# Altium PCB Lakota_PCB.PcbDoc
Units mm, origin at the board's own origin, x right, y up, seen from the top; angles counter-clockwise.
Board outline 26.64 x 15.01 mm, 4 copper layers (TOP, LAYER2, LAYER3, BOTTOM), stack 1 mm thick; 32 components, 43 nets, 131 pads, 189 vias.
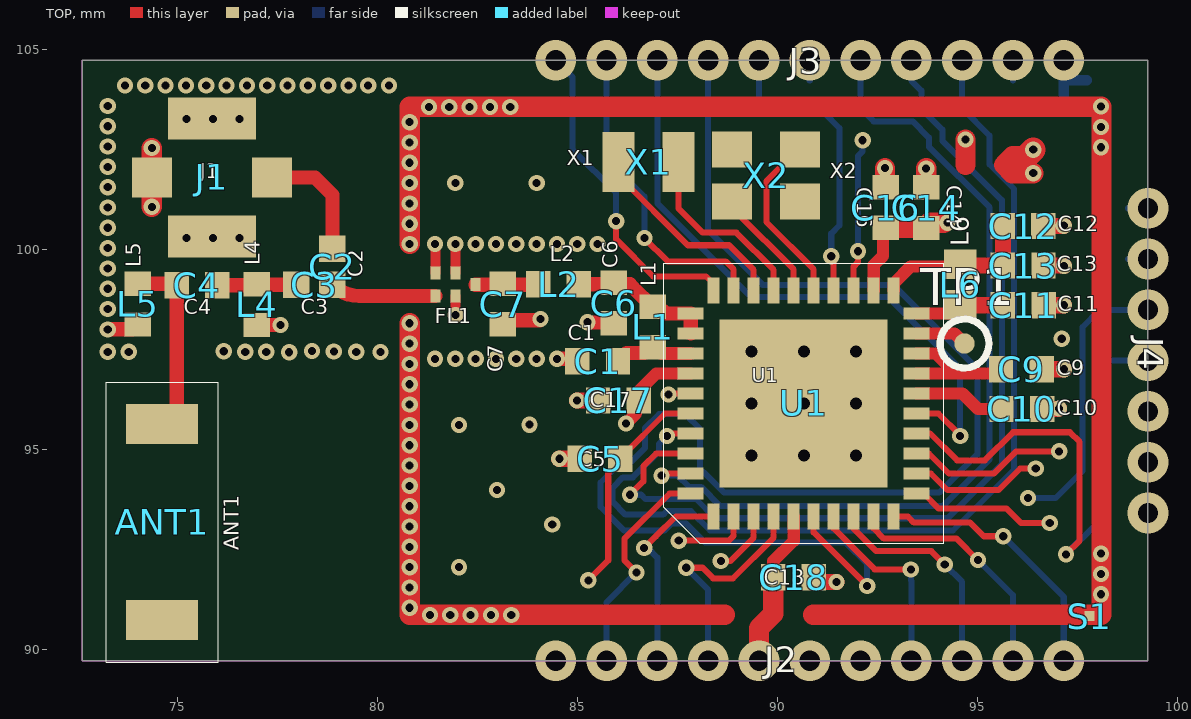
[diagram p0: TOP view]
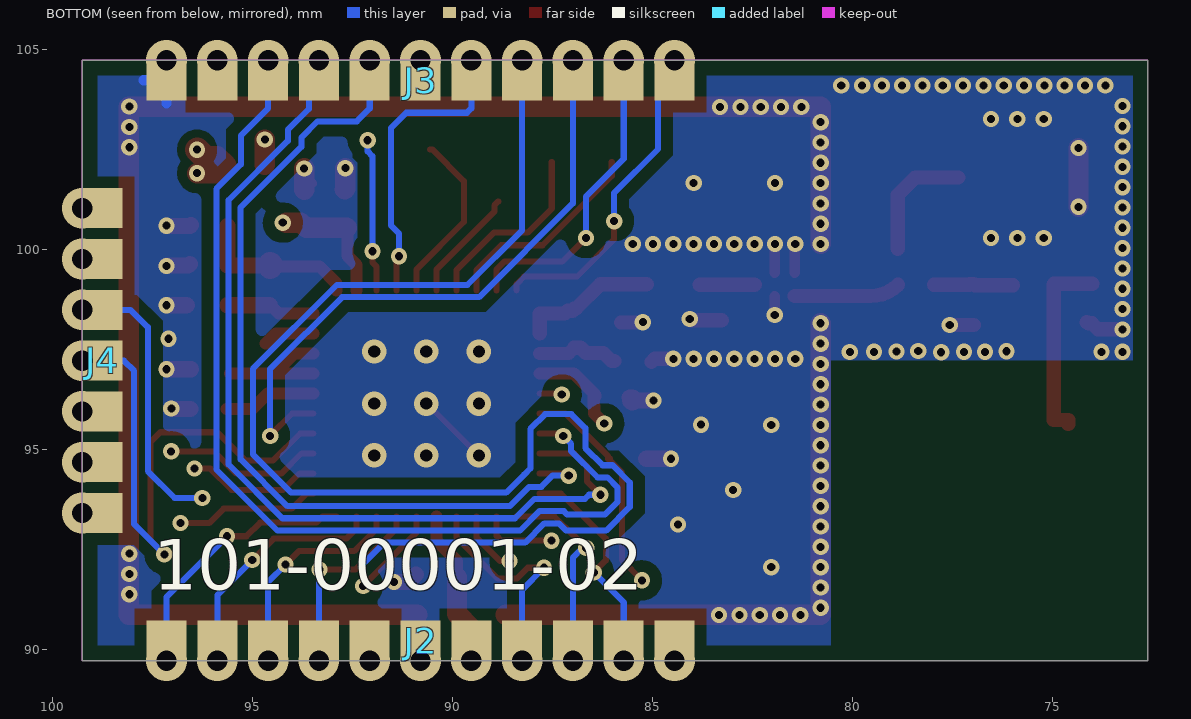
[diagram p1: BOTTOM view, seen from below]
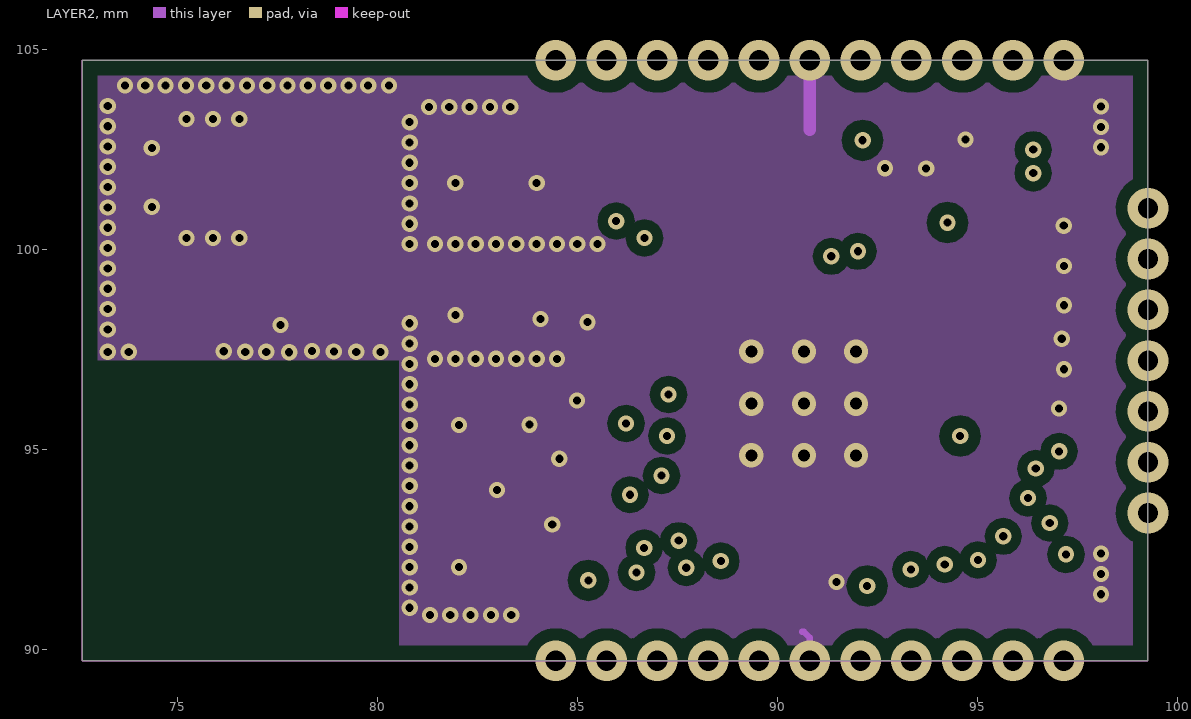
[diagram p2: LAYER2]
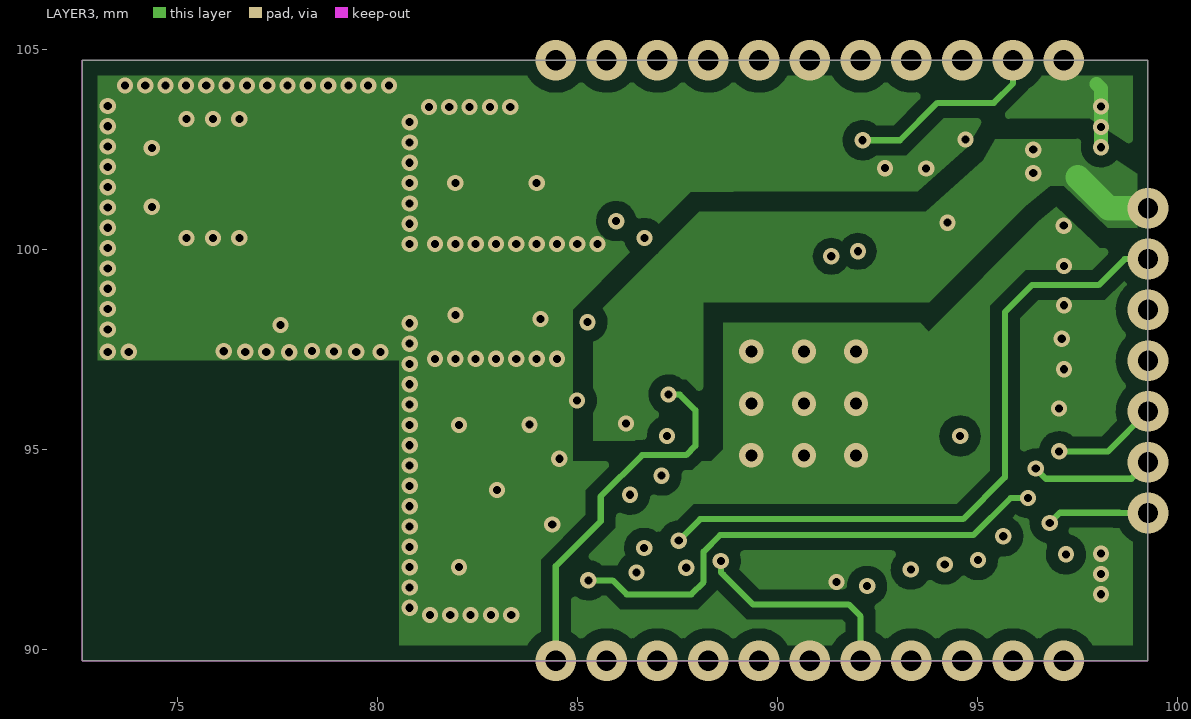
[diagram p3: LAYER3]

## Layer stack, top to bottom
Top Solder: solder mask 0.0102, Solder Resist, Dk 3.5
TOP: signal copper 0.0356
Dielectric 1: core 0.2032, FR-4, Dk 4.5
LAYER2: signal copper 0.0356
Dielectric2: core 0.4514, FR-4, Dk 4.5
LAYER3: signal copper 0.0356
Dielectric3: core 0.2032, FR-4, Dk 4.5
BOTTOM: signal copper 0.0356
Bottom Solder: solder mask 0.0102, Solder Resist, Dk 3.5

## Board outline
72.618,89.711 72.618,104.719 99.26,104.719 99.26,89.711

## Design rules (kind name [scope] priority, off if disabled: settings)
Clearance [All] p1: gap=0.254
PlaneConnect [All] p1: planeconnectstyle=Direct reliefexpansion=0.508 reliefentries=4 reliefconductorwidth=0.254 reliefairgap=0.254
PolygonConnect [All] p1: connectstyle=Direct reliefconductorwidth=0.254 reliefentries=4 polygonreliefangle="90 Angle" airgapwidth=0.254
RoomDefinition Lakota_PCB [InComponentClass('Lakota_PCB')] p1: confinementstyle=ConfineIn formatcopy=TRUE lockcomponents=FALSE outline 0,0 50.8,0 50.8,25.4 0,25.4
RoutingVias [All] p1: holewidth=0.711 width=1.27 viastyle="Through Hole" minholewidth=0.711 minwidth=1.27 maxholewidth=0.711 maxwidth=1.27
SolderMaskExpansion [All] p1: expansion=0.025
Width [All] p1: maxlimit=0.358 minlimit=0.254 preferedwidth=0.358
29 further rules are at their usual default settings.

## Components (designator, comment, footprint, x,y, rotation, side; value= is the part's Value field where it differs from the comment)
ANT1 "ANTENNA_JOHANSON_2450AT42A100_S" JOHANSON_2450AT42A100_SMD 74.611,93.175 r270 top
C1 "CAPACITOR NON-POL_C_0402_100PF" C_0402 85.503,97.2 r0 top
C2 "CAPACITOR NON-POL_C_0402_MOD1_D" C_0402_MOD1 78.868,99.558 r270 top
C3 "CAPACITOR NON-POL_C_0402_MOD1_1" C_0402_MOD1 78.417,99.107 r180 top
C4 "CAPACITOR NON-POL_C_0402_0R" C_0402 75.483,99.098 r180 top
C5 "CAPACITOR NON-POL_C_0402_10NF" C_0402 85.561,94.757 r0 top
C6 "CAPACITOR NON-POL_C_0402_DNI" C_0402 85.9,98.65 r270 top
C7 "CAPACITOR NON-POL_C_0402_DNI" C_0402 83.125,98.625 r270 top
C9 "CAPACITOR NON-POL_C_0402_33NF" C_0402 96.094,96.995 r180 top
C10 "CAPACITOR NON-POL_C_0402_33NF" C_0402 96.105,96.002 r180 top
C11 "CAPACITOR NON-POL_C_0402_220NF" C_0402 96.142,98.595 r180 top
C12 "CAPACITOR NON-POL_C_0402_220NF" C_0402 96.136,100.576 r180 top
C13 "CAPACITOR NON-POL_C_0402_DNI" C_0402 96.141,99.588 r180 top
C14 "CAPACITOR NON-POL_C_0402_DNI" C_0402 93.715,101.033 r270 top
C16 "CAPACITOR NON-POL_C_0402_220NF" C_0402 92.701,101.039 r270 top
C17 "CAPACITOR NON-POL_C_0402_220NF" C_0402 86.023,96.215 r0 top
C18 "CAPACITOR NON-POL_C_0402_220NF" C_0402 90.399,91.796 r180 top
FL1 "SAW_FILTER" SAW_FILTER 82.45,99.112 r180 top
J1 "UFL_UFL_SMD_UFL" UFL_SMD 75.857,101.789 r270 top
J2 "CONN_1_27MM_PITCH_PIN_1_11_11X1" 11X1MM_BOT_PAD_1_TO_11_SMD 90.805,90.211 r0 top
J3 "CONN_1_27MM_PITCH_PIN_19_29_11X" 11X1MM_BOT_PAD_19_TO_29_SMD 90.805,104.219 r180 top
J4 "CONN_1_27MM_PITCH_PIN_12_18_7X1" 7X1MM_BOT_PAD_12_TO_18_SMD 98.76,97.211 r90 top
L1 "INDUCTOR_L_0402_5.6NH" L_0402 86.875,98.05 r90 top
L2 "INDUCTOR_L_0402_0R" L_0402 84.525,99.125 r180 top
L4 "INDUCTOR_L_0402_DNI" L_0402 76.977,98.611 r270 top
L5 "INDUCTOR_L_0402_DNI" L_0402 74.006,98.621 r270 top
L6 "INDUCTOR_L_0603_22UH" L_0603 94.564,99.111 r90 top
S1 "CON1_LAKOTA_SHIELD_SHIELD" LAKOTA_SHIELD 97.801,90.823 r0 top
TP1 "CON1_TP-30C12_CON1" TP-30C12 94.672,97.638 r0 top
U1 "NCS36510_NCS36510_NCS36510" NCS36510 90.653,96.139 r90 top
X1 "CRYSTAL2/SM_HOSONIC_ETDG_20X12_" HOSONIC_ETDG_20X12_SMD 86.775,102.176 r180 top
X2 "CRYSTAL4/SM_HOSONIC_2SB_250X200" HOSONIC_2SB_250X200_SMD 89.712,101.841 r180 top

## Footprints (in the part's own frame and the unit in brackets; to place one, negate y for a bottom-side part, rotate by r counter-clockwise, add the part's x,y. Pads: shape width x height; smd on the part's side, far side on the other; paste and mask are expansions set on the pad)
7X1MM_BOT_PAD_12_TO_18_SMD [mm] "7X1MM_BOT_PAD_12_TO_18_SMD"
  rect 1x1 smd far side: 12(-3.81,0) 13(-2.54,0) 14(-1.27,0) 15(0,0) 16(1.27,0) 17(2.54,0) 18(3.81,0)
11X1MM_BOT_PAD_1_TO_11_SMD [mm] "11X1MM_BOT_PAD_1_TO_11_SMD"
  rect 1x1 smd far side: 1(-6.35,0) 2(-5.08,0) 3(-3.81,0) 4(-2.54,0) 5(-1.27,0) 6(0,0) 7(1.27,0) 8(2.54,0) 9(3.81,0) 10(5.08,0) 11(6.35,0)
11X1MM_BOT_PAD_19_TO_29_SMD [mm] "11X1MM_BOT_PAD_19_TO_29_SMD"
  rect 1x1 smd far side: 19(-6.35,0) 20(-5.08,0) 21(-3.81,0) 22(-2.54,0) 23(-1.27,0) 24(0,0) 25(1.27,0) 26(2.54,0) 27(3.81,0) 28(5.08,0) 29(6.35,0)
C_0402 [mil] "C_0402"
  rect 24x26 smd: 1(-20,0) 2(20,0)
C_0402_MOD1 [mm] "C_0402_MOD1"
  rect 0.66x0.66 smd: 1(-0.45,0) 2(0.45,0)
HOSONIC_2SB_250X200_SMD [mm] "HOSONIC_2SB_250X200_SMD"
  rect 1x0.9 smd: 1(-0.85,-0.65) 2(0.85,-0.65) 3(0.85,0.65) 4(-0.85,0.65)
HOSONIC_ETDG_20X12_SMD [mil] "HOSONIC_ETDG_20X12_SMD"
  rect 31.5x59.06 smd: 1(-29.53,0) 2(29.53,0)
JOHANSON_2450AT42A100_SMD [mm] "JOHANSON_2450AT42A100_SMD"
  rect 1x1.8 smd: 1(-2.45,0) " "(2.45,0)
  silkscreen extent -3.5,-1.4 3.5,1.4
L_0402 [mil] "L_0402"
  rect 24x26 smd: 1(-20,0) 2(20,0)
L_0603 [mil] "L_0603"
  rect 29x32 smd: 1(-20,0) 2(20,0)
LAKOTA_SHIELD [mm] "LAKOTA_SHIELD"
  rect 0.25x0.25 smd: 1(0,0)
NCS36510 [mm] "NCS36510"
  rect 0.65x0.3 smd: 1(-2.825,2.25) 2(-2.825,1.75) 3(-2.825,1.25) 4(-2.825,0.75) 5(-2.825,0.25) 6(-2.825,-0.25) 7(-2.825,-0.75) 8(-2.825,-1.25) 9(-2.825,-1.75) 10(-2.825,-2.25) 21(2.825,-2.25) 22(2.825,-1.75) 23(2.825,-1.25) 24(2.825,-0.75) 25(2.825,-0.25) 26(2.825,0.25) 27(2.825,0.75) 28(2.825,1.25) 29(2.825,1.75) 30(2.825,2.25)
  rect 0.3x0.65 smd: 11(-2.25,-2.825) 12(-1.75,-2.825) 13(-1.25,-2.825) 14(-0.75,-2.825) 15(-0.25,-2.825) 16(0.25,-2.825) 17(0.75,-2.825) 18(1.25,-2.825) 19(1.75,-2.825) 20(2.25,-2.825) 31(2.25,2.825) 32(1.75,2.825) 33(1.25,2.825) 34(0.75,2.825) 35(0.25,2.825) 36(-0.25,2.825) 37(-0.75,2.825) 38(-1.25,2.825) 39(-1.75,2.825) 40(-2.25,2.825)
  rect 4.2x4.2 smd: 41(0,0)
  silkscreen extent -3.5,-3.5 3.5,3.5
SAW_FILTER [mm]
  rect 0.25x0.325 smd mask+0.025: 1(0,0) 2(0.5,-0.288) 3(1,-0.288) 4(1,0.288) 5(0.5,0.288)
TP-30C12 [mil] "TP-30C12"
  round 20 smd: 1(0,0)
  silkscreen extent -24,-24 24,24
UFL_SMD [mm] "UFL_SMD"
  rect 1x1 smd: 1(0,1.5) 4(0,-1.5)
  rect 1.05x2.2 smd: 2(-1.475,0) 3(1.475,0)

## Part data
ANT1: library part ANTENNA_0
C1 C2 C3 C4 C5 C6 C7 C9 C10 C11 C12 C13 C14 C16 C17 C18: library part CAPACITOR_NP
FL1: "SAW Filter"
J1: library part CONN_UFL
J2: library part CONN_1_27mm_pitch_pin_1_11
J3: library part CONN_1_27mm_pitch_pin_19_29
J4: library part CONN_1_27mm_pitch_pin_12_18
L1 L2 L4 L5 L6: library part INDUCTOR
S1: library part SHIELD
TP1: library part TESTPOINT
U1: library part NCS36510
X1: library part XTAL, "Crystal Oscillator"
X2: library part XTAL_4pin, "Crystal Oscillator"

## Via types
v1: diameter 0.406, hole 0.203, TOP to BOTTOM, 151 vias
v2: diameter 1.016, hole 0.508, TOP to BOTTOM, 29 vias
v3: diameter 0.61, hole 0.305, TOP to BOTTOM, 9 vias

## Nets (pads, with @x,y where several pads share a name; then routed paths per layer and width w, separated by ;. In a path a pad name is that pad's centre, name@x,y a point inside that pad or via, vN(x,y) a via of type N, cw(c..) or ccw(c..) an arc to the next point about the centre after c; other vN are vias at no path point)
A0: J3.20 U1.23 | length 9.3
  TOP w0.152: U1.23 91.903,99.559 92.008,99.665 v1(92.008,99.944)
  LAYER3 w0.152: v1(92.127,102.719) 93.061,102.719 93.994,103.653 95.403,103.653 95.885,104.134 v2(95.885,104.719)
  BOTTOM w0.152: v1(92.008,99.944) 92.008,102.321 92.127,102.44 v1(92.127,102.719) ; J3.20 v2(95.885,104.719)
A1: J3.25 U1.24 | length 7.6
  TOP w0.152: v1(91.341,99.819) 91.403,99.758 U1.24
  BOTTOM w0.152: v2(89.535,104.719) J3.25 89.535,103.515 89.644,103.406 91.161,103.406 91.548,103.02 91.548,100.59 91.341,100.384 v1(91.341,99.819)
A2: J3.28 U1.29 | length 7.9
  TOP w0.152: v1(86.67,100.274) 87.252,99.693 88.702,99.693 88.903,99.492 U1.29
  BOTTOM w0.152: v2(85.725,104.719) J3.28 85.725,102.256 86.67,101.311 v1(86.67,100.274)
A3: J3.29 U1.30 | length 8.2
  TOP w0.152: v1(85.964,100.698) 85.964,100.241 86.891,99.314 88.214,99.314 88.403,99.126 U1.30
  BOTTOM w0.152: v2(84.455,104.719) 84.868,104.305 84.868,102.5 85.964,101.404 v1(85.964,100.698)
DIO0: J4.15 U1.14 | length 14
  TOP w0.152: U1.14 93.815,95.389 94.489,94.714 95.183,94.714 95.89,95.421 97.31,95.421 97.552,95.178 97.552,92.71 v1(97.209,92.367)
  BOTTOM w0.152: v1(97.209,92.367) 97.966,93.124 97.966,96.955 98.222,97.211 J4.15 v2(99.26,97.211)
DIO1: J4.14 U1.13 | length 6.6
  TOP w0.152: U1.13 93.781,94.889 94.286,94.385 95.409,94.385 95.968,94.943 v1(97.039,94.943)
  LAYER3 w0.152: v1(97.039,94.943) 98.263,94.943 v2(99.26,95.941)
DIO2: J4.13 U1.12 | length 6.5
  TOP w0.152: U1.12 93.834,94.389 94.246,93.977 95.526,93.977 96.061,94.511 v1(96.455,94.511)
  LAYER3 w0.152: v1(96.455,94.511) 96.709,94.257 98.847,94.257 v2(99.26,94.671)
DIO3: J4.12 U1.11 | length 6.2
  TOP w0.152: U1.11 93.653,93.889 94.029,93.513 95.728,93.513 96.09,93.15 v1(96.804,93.15)
  LAYER3 w0.152: v1(96.804,93.15) 96.804,93.154 97.058,93.408 98.542,93.408 98.549,93.401 v2(99.26,93.401)
DIO4: J2.11 U1.10 | length 6.7
  TOP w0.152: U1.10 93.256,93.314 93.408,93.161 94.815,93.161 95.157,92.819 v1(95.642,92.819)
  BOTTOM w0.152: v1(95.642,92.819) 97.155,91.306 J2.11 v2(97.155,89.711)
DIO5: J2.10 U1.9 | length 6.1
  TOP w0.152: U1.9 92.403,93.016 92.658,92.76 94.475,92.76 v1(95.01,92.225)
  BOTTOM w0.152: v1(95.01,92.225) 95.885,91.35 J2.10 v2(95.885,89.711)
DIO6: J2.9 U1.8 | length 5.5
  TOP w0.152: U1.8 91.903,93.01 92.465,92.448 93.846,92.448 v1(94.181,92.113)
  BOTTOM w0.152: v1(94.181,92.113) 94.615,91.679 J2.9 v2(94.615,89.711)
DIO7: J2.8 U1.7 | length 4.9
  TOP w0.152: U1.7 91.403,93.016 92.429,91.989 v1(93.331,91.989)
  BOTTOM w0.152: v1(93.331,91.989) 93.331,91.71 93.345,91.696 J2.8 v2(93.345,89.711)
DIO8: J2.7 U1.3 | length 6.9
  TOP w0.152: v1(88.581,92.2) 88.817,92.2 89.403,92.786 U1.3
  LAYER3 w0.152: v1(88.581,92.2) 88.581,91.921 88.642,91.86 88.642,91.858 89.384,91.115 91.774,91.115 92.075,90.814 v2(92.075,89.711)
DIO9: J4.17 U1.2 | length 19.5
  TOP w0.152: v1(87.528,92.71) 88.782,92.71 88.903,92.831 U1.2
  LAYER3 w0.152: v1(87.528,92.71) 88.067,93.249 94.637,93.249 95.682,94.293 95.682,98.425 96.356,99.099 98.025,99.099 98.676,99.751 v2(99.26,99.751)
  BOTTOM w0.152: J4.17 v2(99.26,99.751)
DIO10: J2.3 U1.1 | length 5.1
  TOP w0.152: v1(86.665,92.527) 86.952,92.815 86.956,92.815 87.456,93.314 U1.1
  BOTTOM w0.152: v1(86.665,92.527) 86.755,92.527 86.995,92.288 J2.3 v2(86.995,89.711)
DIO11: J3.23 U1.39 | length 21.6
  TOP w0.152: v1(87.1,94.335) 87.147,94.335 87.201,94.389 U1.39
  BOTTOM w0.152: v1(87.1,94.335) 87.507,94.335 87.786,94.056 88.087,94.056 88.57,93.574 94.132,93.574 95.301,94.742 95.301,101.041 93.784,102.558 93.784,102.787 93.38,103.192 92.399,103.192 92.075,103.515 J3.23 v2(92.075,104.719)
DIO12: J3.22 U1.38 | length 22.8
  TOP w0.152: v1(86.31,93.858) 86.646,94.194 86.646,94.572 86.963,94.889 U1.38
  BOTTOM w0.152: v1(86.31,93.858) 86.589,93.858 86.695,93.752 87.602,93.752 87.96,93.751 88.443,93.269 94.259,93.269 95.606,94.616 95.606,101.22 94.119,102.706 94.119,102.982 93.593,103.507 93.593,103.962 93.345,104.211 J3.22
  other v2: 93.345,104.719
DIO13: J3.21 U1.37 | length 24.3
  TOP w0.152: v1(87.237,95.328) 87.298,95.389 U1.37
  BOTTOM w0.152: v1(87.237,95.328) 87.039,95.13 87.039,94.948 86.381,94.29 86.131,94.29 85.878,94.037 85.878,93.679 86.195,93.361 87.137,93.361 87.223,93.447 87.476,93.447 ; 87.476,93.447 87.834,93.447 88.317,92.964 94.385,92.964 95.91,94.489 95.91,101.505 95.298,102.117 95.298,102.832 94.615,103.515 J3.21
  other v2: 94.615,104.719
DIO14: J3.27 U1.15 | length 15.9
  TOP w0.152: U1.15 94.016,95.889 94.564,95.341 v1(94.564,95.326)
  BOTTOM w0.152: v2(86.995,104.719) J3.27 86.995,101.143 89.338,98.8 92.767,98.8 94.564,97.003 v1(94.564,95.326)
DIO15: J3.26 U1.6 | length 37.6
  TOP w0.152: U1.6 90.903,92.915 v1(92.24,91.578)
  BOTTOM w0.152: v2(88.265,104.719) J3.26 88.265,100.47 89.63,99.105 92.893,99.105 94.996,97.002 94.996,94.868 94.038,93.911 88.664,93.911 88.213,94.361 88.061,94.513 88.061,95.503 87.688,95.875 87.037,95.875 86.684,95.523 86.684,95.025 86.254,94.594 86.004,94.594 85.573,94.163 85.573,93.552 86.166,92.959 87.166,92.959 87.349,93.142 87.707,93.142 88.19,92.659 91.707,92.659 92.24,92.127 v1(92.24,91.578)
DIO16: J2.4 U1.4 | length 5.8
  TOP w0.152: v1(87.718,92.033) 88.124,92.033 88.389,91.768 88.885,91.768 89.903,92.786 U1.4
  BOTTOM w0.152: v1(87.718,92.033) 88.265,91.486 J2.4 v2(88.265,89.711)
DIO17: J2.2 U1.40 | length 5.6
  TOP w0.152: v1(86.471,91.915) 86.171,92.215 86.171,92.761 87.299,93.889 U1.40
  BOTTOM w0.152: v2(85.725,89.711) J2.2 85.725,91.168 v1(86.471,91.915)
DVDD: C10.2 U1.16 | length 2.3
  TOP w0.305: U1.16 94.626,96.389 95.013,96.002 C10.2 C10.2@95.655,96.002
FVDDH: C9.2 U1.17 U1.18 | length 3.3
  TOP w0.305: U1.17 94.453,96.889 ; U1.18 93.963,97.389 94.453,96.899 94.453,96.889 ; C9.2@95.56,96.889 94.453,96.889
FVDDL: TP1.1 U1.19 | length 1.3
  TOP w0.305: U1.19 94.082,97.889 ; 94.082,97.889 94.422,97.889 TP1.1
GND: C1.1 C5.1 C6.2 C7.2 C9.1 C10.1 C11.1 C12.1 C13.1 C14.1 C16.1 C17.1 C18.1 FL1.2 FL1.3 FL1.5 J1.2 J1.3 J1.4 J2.6 J3.19 J3.24 L4.2 L5.2 S1.1 U1.41 | length 78.8
  TOP w0.152: L5.2 74.087,98.113 L5.2@74.115,98.141 ; C1.1@84.954,97.255 84.954,97.2 C1.1 ; v3(89.344,94.842) 89.355,94.842 U1.41 ; C18.1 90.919,91.796 C18.1@90.919,91.866 ; C16.1@92.701,101.489 C16.1 ; 94.696,102.102 94.707,102.102 ; S1.1 97.809,90.815 98.037,90.815 98.076,90.854 98.099,90.877 98.145,90.923 98.145,91.308 98.099,91.355 v1(98.084,91.37)
  TOP w0.254: v1(81.436,100.125) 81.45,100.111 FL1.3 ; v1(81.944,100.125) 81.95,100.119 FL1.2 ; v1(81.95,98.35) FL1.5 ; C14.1@93.523,101.644 C14.1@93.715,101.836
  TOP w0.358: v1(73.253,97.991) 73.868,97.991 74.018,98.141 74.115,98.141 L5.2@74.145,98.171 ; L4.2 v1(77.575,98.103) ; C7.2@83.276,98.221 84.046,98.221 v1(84.075,98.25) ; v1(84.484,97.255) 84.954,97.255 C1.1@85.031,97.177 ; v1(85.247,98.172) 85.257,98.162 C6.2@85.793,98.162
  TOP w0.406: v1(84.544,94.757) C5.1 C5.1@85.162,94.757 ; v1(84.983,96.215) C17.1 ; C17.1@85.515,96.233 C17.1@85.573,96.291 ; C18.1@90.919,91.866 91.105,91.679 v1(91.47,91.679) ; C9.1@96.544,96.995 C9.1 v1(97.159,96.995) ; C12.1@96.545,100.598 96.568,100.576 C12.1 97.145,100.576 v1(97.154,100.585) ; C10.1@96.555,96.002 C10.1 C10.1@96.828,96.002 ; C13.1@96.573,99.629 96.614,99.588 C13.1 97.148,99.588 v1(97.158,99.578) ; C11.1 97.157,98.595 v1(97.158,98.596) ; C10.1@96.828,96.002 97.026,96.002 v1(97.034,96.011)
  TOP w0.508: v1(74.357,101.054) J1.4 v1(74.357,102.528) ; v1(80.801,98.144) v1(80.801,97.636) v1(80.801,97.128) v1(80.801,96.62) v1(80.801,96.112) v1(80.801,95.604) v1(80.801,95.096) v1(80.801,94.588) v1(80.801,94.08) v1(80.801,93.572) v1(80.801,93.064) v1(80.801,92.556) v1(80.801,92.048) v1(80.801,91.54) v1(80.801,91.032) 80.801,90.854 v1(81.309,90.854) v1(81.817,90.854) v1(82.325,90.854) v1(82.833,90.854) v1(83.341,90.854) 88.675,90.854 ; v1(80.801,100.125) v1(80.801,100.633) v1(80.801,101.141) v1(80.801,101.649) v1(80.801,102.157) v1(80.801,102.665) v1(80.801,103.173) 80.801,103.554 v1(81.284,103.554) v1(81.792,103.554) v1(82.3,103.554) v1(82.808,103.554) v1(83.316,103.554) 98.099,103.554 98.099,102.546 98.099,91.355 98.099,90.877 98.099,90.854 98.076,90.854 90.885,90.854 ; C17.1 C17.1@85.515,96.233 ; v1(92.685,102.022) 92.685,101.505 C16.1@92.701,101.489 ; C14.1@93.715,101.483 C14.1 93.715,101.836 v1(93.715,102.017) ; 94.696,102.102 v1(94.696,102.74)
  LAYER2 w0.152: 90.61,90.433 90.659,90.433 90.805,90.287 v2(90.805,89.711)
  LAYER2 w0.305: 90.805,102.983 v2(90.805,104.719)
  LAYER3 w0.356: 97.97,104.125 98.084,104.012 v1(98.084,103.562) v1(98.084,103.054) v1(98.084,102.546)
  BOTTOM w0.152: J3.24 v2(90.805,104.719) ; J3.19 v2(97.155,104.719)
  BOTTOM w0.254: 97.155,103.642 J3.19 97.732,104.219
  other v1: 98.084,91.878 82.036,92.048 98.084,92.386 84.368,93.111 82.988,93.979 82.036,95.604 83.795,95.61 81.436,97.255 81.944,97.255 82.452,97.255 82.96,97.255 83.468,97.255 83.976,97.255 77.789,97.42 73.253,97.43 73.778,97.43 76.153,97.445 76.691,97.43 77.217,97.43 78.906,97.44 79.468,97.43 80.072,97.425 78.36,97.45 97.103,97.758 73.253,98.499 73.253,99.007 73.253,99.515 73.253,100.023 82.452,100.125 82.96,100.125 83.468,100.125 83.976,100.125 84.484,100.125 84.992,100.125 85.5,100.125 75.224,100.276 75.884,100.276 76.545,100.276 73.253,100.531 73.253,101.039 73.253,101.547 81.944,101.649 83.976,101.649 73.253,102.055 73.253,102.563 73.253,103.071 75.224,103.248 75.884,103.248 76.545,103.248 73.253,103.579 73.685,104.087 74.193,104.087 74.701,104.087 75.209,104.087 75.717,104.087 76.225,104.087 76.733,104.087 77.241,104.087 77.749,104.087 78.257,104.087 78.765,104.087 79.272,104.087 79.765,104.087 80.288,104.087
  other v3: 90.66,94.842 91.959,94.842 89.344,96.137 90.66,96.137 91.959,96.137 89.344,97.439 90.66,97.439 91.959,97.439
NetANT1_1: ANT1.1 C4.2 L5.1 | length 4.8
  TOP w0.358: L5.1 74.969,99.129 74.975,99.123 C4.2 74.975,95.726 74.611,95.726 ANT1.1
NetC2_1: C2.1 J1.1 | length 3
  TOP w0.152: C2.1 C2.1@78.872,100.008
  TOP w0.358: J1.1 78.435,101.789 78.872,101.351 C2.1@78.872,100.009
NetC2_2: C2.2 C3.1 FL1.4 | length 2.7
  TOP w0.358: C2.2 ccw(c79.549,99.789) 79.549,98.825 FL1.4
NetC3_2: C3.2 C4.1 L4.1 | length 2
  TOP w0.358: C4.1 76.957,99.098 L4.1 77.079,99.119 77.091,99.107 C3.2
NetC6_1: C6.1 L1.2 L2.1 U1.31 U1.32 | length 3.7
  TOP w0.152: C6.1@85.793,99.178 85.797,99.178 C6.1@85.797,99.116 ; L1.2@86.915,98.513 86.915,98.54 L1.2@86.968,98.54
  TOP w0.358: L2.1@85.148,99.116 C6.1@85.789,99.116 ; U1.32 U1.31 87.196,98.389 87.126,98.459 86.998,98.459 86.968,98.489 86.968,98.513 86.915,98.513 86.312,99.116 C6.1@85.797,99.116 ; C6.1@85.789,99.116 C6.1@85.797,99.116 ; C6.1@85.789,99.116 85.793,99.12 C6.1@85.797,99.116
NetC7_1: C7.1 FL1.1 L2.2 | length 1.4
  TOP w0.152: C7.1@82.823,99.178 C7.1@82.833,99.178
  TOP w0.358: FL1.1@82.45,99.111 83.793,99.111 L2.2@83.83,99.11
NRESET: C5.2 J4.16 U1.36 | length 25.3
  TOP w0.152: v1(85.269,91.718) 85.766,92.215 85.766,94.406 C5.2@86.117,94.757 ; C5.2 C5.2@86.117,94.757 ; U1.36 87.185,95.889 86.117,94.821 C5.2@86.117,94.757
  LAYER3 w0.152: v1(85.269,91.718) 85.876,91.718 86.226,91.368 87.845,91.368 88.149,91.673 88.149,92.436 88.56,92.846 94.897,92.846 95.826,93.776 v1(96.26,93.776)
  BOTTOM w0.152: v1(96.26,93.776) 96.948,93.776 97.623,94.45 97.623,98.047 98.057,98.481 J4.16 v2(99.26,98.481)
RFPWR: C1.2 L1.1 U1.33 | length 2.1
  TOP w0.152: L1.1@86.968,97.524 L1.1@86.968,97.531
  TOP w0.33: L1.1@86.955,97.531 87.097,97.389 U1.33
  TOP w0.358: C1.2@85.953,97.2 C1.2 86.03,97.2 86.23,97.401 86.672,97.401 86.802,97.531 86.955,97.531 L1.1@86.968,97.531
TEST: J2.1 U1.35 | length 9.7
  TOP w0.152: v1(87.274,96.363) 87.301,96.389 U1.35
  LAYER3 w0.152: v2(84.455,89.711) 84.455,92.071 85.579,93.195 85.579,93.815 86.614,94.85 87.713,94.85 87.945,95.083 87.945,95.971 87.554,96.363 v1(87.274,96.363)
V1VI: C12.2 C13.2 L6.2 U1.21 | length 4.1
  TOP w0.305: U1.21 92.903,99.139 93.324,99.561 L6.2@94.564,99.561
  TOP w0.406: L6.2 94.595,99.588 C13.2 95.633,100.571 C12.2
  TOP w0.61: L6.2@94.564,99.561 L6.2
V1VO: C11.2 L6.1 U1.20 | length 2.2
  TOP w0.305: U1.20 94.35,98.389 L6.1 L6.1@94.572,98.595
  TOP w0.406: L6.1@94.572,98.595 C11.2
VDD: C14.2 C16.2 C17.2 J4.18 U1.22 U1.34 | length 10.2
  TOP w0.152: C17.2@86.473,96.215 C17.2 ; C14.2 C14.2@93.715,100.583 ; 95.665,102.102 95.723,102.102
  TOP w0.305: v1(86.212,95.64) 86.464,95.891 86.464,96.079 86.473,96.088 86.473,96.215 86.473,96.291 86.454,96.291 86.428,96.316 86.428,96.352 86.965,96.889 U1.34 ; U1.22 92.403,99.598 92.634,99.829 92.634,100.522 C16.2@92.643,100.531 ; C14.2@93.715,100.583 C14.2@93.792,100.66 ; v1@94.158,100.66 v1(94.248,100.66)
  TOP w0.508: C16.2@92.643,100.531 C16.2 93.662,100.531 C14.2@93.715,100.583 ; C14.2@93.792,100.66 v1@94.158,100.66 ; 96.226,102.32 95.883,102.32 95.665,102.102 95.869,101.898 v1(96.391,101.898)
  TOP w0.61: 96.226,102.32 v1(96.391,102.484)
  LAYER3 w0.61: 97.503,101.798 98.28,101.021 v2(99.26,101.021)
  BOTTOM w0.152: J4.18 v2(99.26,101.021)
VDDIO: C18.2 J2.5 U1.5 | length 4.5
  TOP w0.152: C18.2 C18.2@89.893,91.796
  TOP w0.305: C18.2@89.893,91.796 89.893,92.2 90.403,92.709 U1.5
  TOP w0.508: v2(89.535,89.711) 89.535,90.524 89.893,90.882 C18.2@89.893,91.796
  BOTTOM w0.152: v2(89.535,89.711) J2.5
X32KI: U1.28 X1.2 | length 5.2
  TOP w0.152: X1.2 86.024,101.826 87.756,100.095 88.788,100.095 89.403,99.48 U1.28
X32KO: U1.27 X1.1 | length 4.7
  TOP w0.152: X1.1 87.525,101.012 88.126,100.411 88.972,100.411 89.903,99.48 U1.27
X32MI: U1.26 X2.3 | length 2.9
  TOP w0.152: X2.3 88.958,101.094 88.958,100.937 90.403,99.492 U1.26
X32MO: U1.25 X2.1 | length 4.4
  TOP w0.152: X2.1 90.511,102.491 89.719,101.698 89.719,100.676 90.903,99.492 U1.25
pads on no net: "ANT1. " X2.2 X2.4

## Polygon pours and split planes (outlines as drawn)
VDD on LAYER3 "LAYER3-VDD" (solid, pour order 0): 255 vertices, not listed, extent 85.386,95.208 99.009,102.76
GND on LAYER3 "LAYER3-GND" (solid, pour order 2): 224 vertices, not listed, extent 84.837,90.092 91.694,91.472
GND on LAYER3 "LAYER3-GND 1" (solid, pour order 6): 72 vertices, not listed, extent 95.69,102.65 98.879,104.338
GND on LAYER3 "LAYER3-GND 2" (solid, pour order 8): 515 vertices, not listed, extent 73,90.092 95.087,104.338
GND on LAYER3 "LAYER3-GND 3" (solid, pour order 10): 198 vertices, not listed, extent 96.063,94.946 98.725,99.197
GND on LAYER3 "LAYER3-GND 4" (solid, pour order 12): 270 vertices, not listed, extent 85.282,92.099 98.264,101.052
GND on LAYER3 "LAYER3-GND 5" (solid, pour order 14): 648 vertices, not listed, extent 89.047,90.092 98.879,93.366
GND on LAYER2 "LAYER2-GND" (solid, pour order 4): 946 vertices, not listed, extent 73,90.092 98.879,104.338
GND on BOTTOM "BOTTOM-GND" (solid, pour order 16): 200 vertices, not listed, extent 92.389,97.833 94.919,102.81
GND on BOTTOM "BOTTOM-GND 1" (solid, pour order 18): 74 vertices, not listed, extent 88.647,90.711 91.873,92.278
GND on BOTTOM "BOTTOM-GND 2" (solid, pour order 20): 224 vertices, not listed, extent 95.472,95.02 98.879,104.338
GND on BOTTOM "BOTTOM-GND 3" (solid, pour order 22): 360 vertices, not listed, extent 73,90.092 94.321,104.338
GND on BOTTOM "BOTTOM-GND 4" (solid, pour order 24): 49 vertices, not listed, extent 97.308,90.092 98.879,92.595

## Keep-outs
Keep-Out Layer:
  lines w0.025: 0.482,0.965 559.282,0.965 ; 0.482,0.965 0.482,3.505 ; 0.482,0.965 559.282,0.965 ; 0.482,0.965 0.482,3.505 ; 0.482,3.505 0.482,432.765 ; 0.482,3.505 0.482,432.765 ; 0.482,432.765 559.282,432.765 ; 0.482,432.765 559.282,432.765 ; 13.182,18.745 13.182,414.985 ; 13.182,18.745 28.422,18.745 ; 13.182,18.745 13.182,414.985 ; 13.182,18.745 28.422,18.745 ; 13.182,414.985 25.882,414.985 13.182,414.985 ; 28.422,18.745 414.502,18.745 ; 28.422,18.745 414.502,18.745 ; 69.062,414.985 544.042,414.985 ; 69.062,414.985 20.802,414.985 69.062,414.985 ; 69.062,414.985 544.042,414.985 ; 290.042,84.785 290.042,18.745 290.042,84.785 ; 290.042,84.785 546.582,84.785 290.042,84.785 ; 356.082,46.685 356.082,49.225 ; 356.082,46.685 356.082,18.745 356.082,46.685 ; 356.082,46.685 356.082,49.225 ; 356.082,49.225 356.082,74.625 ; 356.082,49.225 356.082,74.625 ; 356.082,74.625 356.082,84.785 356.082,74.625 ; 401.802,31.445 401.802,46.685 ; 401.802,31.445 400.532,31.445 401.802,31.445 ; 401.802,31.445 401.802,46.685 ; 401.802,46.685 401.802,49.225 ; 401.802,46.685 401.802,49.225 ; 401.802,49.225 401.802,84.785 401.802,49.225 ; 401.802,54.305 356.082,54.305 401.802,54.305 ; 401.802,54.305 419.582,54.305 401.802,54.305 ; 401.802,61.925 356.082,61.925 401.802,61.925 ; 401.802,61.925 419.582,61.925 401.802,61.925 ; 401.802,69.545 356.082,69.545 401.802,69.545 ; 401.802,69.545 419.582,69.545 401.802,69.545 ; 414.502,18.745 546.582,18.745 ; 414.502,18.745 546.582,18.745 ; 417.042,417.525 417.042,427.685 417.042,417.525 ; 417.042,417.525 417.042,414.985 417.042,417.525 ; 419.582,39.065 356.082,39.065 419.582,39.065 ; 419.582,39.065 546.582,39.065 419.582,39.065 ; 419.582,46.685 290.042,46.685 419.582,46.685 ; 419.582,46.685 419.582,44.145 419.582,46.685 ; 544.042,414.985 546.582,414.985 ; 544.042,414.985 546.582,414.985 ; 546.582,18.745 546.582,414.985 ; 546.582,18.745 546.582,414.985 ; 559.282,0.965 559.282,432.765 ; 559.282,0.965 559.282,432.765 ; 5.562,110.185 13.182,110.185 5.562,110.185 ; 5.562,219.405 13.182,219.405 5.562,219.405 ; 5.562,328.625 13.182,328.625 5.562,328.625 ; 72.618,89.711 99.26,89.711 99.26,104.719 76.821,104.719 72.618,104.719 72.618,89.711 ; 137.642,6.045 137.642,18.745 137.642,6.045 ; 137.642,414.985 137.642,427.685 137.642,414.985 ; 274.802,6.045 274.802,18.745 274.802,6.045 ; 274.802,414.985 274.802,427.685 274.802,414.985 ; 290.042,77.165 419.582,77.165 290.042,77.165 ; 356.082,25.095 419.582,25.095 356.082,25.095 ; 356.082,31.445 419.582,31.445 356.082,31.445 ; 381.482,384.505 381.482,414.985 381.482,384.505 ; 381.482,399.745 546.582,399.745 381.482,399.745 ; 381.482,407.365 546.582,407.365 381.482,407.365 ; 391.642,384.505 391.642,407.365 391.642,384.505 ; 417.042,6.045 417.042,18.745 417.042,6.045 ; 419.582,18.745 419.582,84.785 419.582,18.745 ; 419.582,26.365 546.582,26.365 419.582,26.365 ; 419.582,64.465 546.582,64.465 419.582,64.465 ; 432.282,26.365 432.282,39.065 432.282,26.365 ; 442.442,18.745 442.442,26.365 442.442,18.745 ; 457.682,26.365 457.682,39.065 457.682,26.365 ; 490.702,6.045 490.702,13.665 490.702,6.045 ; 493.242,420.065 493.242,427.685 493.242,420.065 ; 498.322,384.505 498.322,407.365 498.322,384.505 ; 500.862,18.745 500.862,26.365 500.862,18.745 ; 521.182,384.505 521.182,407.365 521.182,384.505 ; 546.582,110.185 554.202,110.185 546.582,110.185 ; 546.582,219.405 554.202,219.405 546.582,219.405 ; 546.582,328.625 554.202,328.625 546.582,328.625
  text "4" at 66.522,420.065 h6.35
  text "4" at 66.522,420.065 h6.35
  text "3" at 203.682,420.065 h6.35
  text "3" at 203.682,420.065 h6.35
  text "2" at 345.922,420.065 h6.35
  text "2" at 345.922,420.065 h6.35
  text "REVISIONS" at 444.982,409.905 h2.54
  text "REVISIONS" at 444.982,409.905 h2.54
  text "REV" at 384.022,402.285 h2.54
  text "REV" at 384.022,402.285 h2.54
  text "DESCRIPTION" at 429.742,402.285 h2.54
  text "DESCRIPTION" at 429.742,402.285 h2.54
  text "DATE" at 503.402,402.285 h2.54
  text "DATE" at 503.402,402.285 h2.54
  text "APPROVED" at 523.722,402.285 h2.54
  text "APPROVED" at 523.722,402.285 h2.54
  text "D" at 5.562,374.345 h6.35
  text "D" at 5.562,374.345 h6.35
  text "D" at 551.662,374.345 h6.35
  text "D" at 551.662,374.345 h6.35
  text "C" at 549.122,260.045 h6.35
  text "C" at 549.122,260.045 h6.35
  text "C" at 5.562,252.425 h6.35
  text "C" at 5.562,252.425 h6.35
  text "B" at 551.662,155.905 h6.35
  text "B" at 551.662,155.905 h6.35
  text "B" at 5.562,150.825 h6.35
  text "B" at 5.562,150.825 h6.35
  text "UNLESS OTHERWISE SPECIFIED" at 296.392,79.705 h1.91
  text "UNLESS OTHERWISE SPECIFIED" at 296.392,79.705 h1.91
  text "SIGNATURES" at 367.512,79.705 h1.91
  text "SIGNATURES" at 367.512,79.705 h1.91
  text "DATE" at 406.882,79.705 h1.91
  text "DATE" at 406.882,79.705 h1.91
  text "DIMENSIONS ARE IN INCHES" at 296.392,73.355 h1.91
  text "DIMENSIONS ARE IN INCHES" at 296.392,73.355 h1.91
  text "DRAWN" at 358.622,72.085 h1.91
  text "DRAWN" at 358.622,72.085 h1.91
  text "MMB Networks" at 450.062,72.085 h2.54
  text "MMB Networks" at 450.062,72.085 h2.54
  text "TOLERANCES ON;" at 296.392,68.275 h1.91
  text "TOLERANCES ON;" at 296.392,68.275 h1.91
  text "CHECKED" at 358.622,64.465 h1.91
  text "CHECKED" at 358.622,64.465 h1.91
  text "2 PL DECIMALS +" at 296.392,63.195 h1.91
  text "2 PL DECIMALS +" at 296.392,63.195 h1.91
  text "A" at 551.662,61.925 h6.35
  text "A" at 551.662,61.925 h6.35
  text "A" at 5.562,59.385 h6.35
  text "A" at 5.562,59.385 h6.35
  text "3 PL DECIMALS +" at 296.392,58.115 h1.91
  text "3 PL DECIMALS +" at 296.392,58.115 h1.91
  text "ENGRG" at 358.622,56.845 h1.91
  text "ENGRG" at 358.622,56.845 h1.91
  text "ANGLES +" at 296.392,53.035 h1.91
  text "ANGLES +" at 296.392,53.035 h1.91
  text "ISSUED" at 358.622,49.225 h1.91
  text "ISSUED" at 358.622,49.225 h1.91
  text "FRACTIONS +" at 296.392,47.955 h1.91
  text "FRACTIONS +" at 296.392,47.955 h1.91
  text "SIZE" at 422.122,35.255 h1.91
  text "SIZE" at 422.122,35.255 h1.91
  text "FSCM NO" at 434.822,35.255 h1.91
  text "FSCM NO" at 434.822,35.255 h1.91
  text "DWG NO" at 460.222,35.255 h1.91
  text "DWG NO" at 460.222,35.255 h1.91
  text "SCALE" at 420.852,22.555 h1.91
  text "SCALE" at 420.852,22.555 h1.91
  text "SHEET" at 503.402,22.555 h1.91
  text "SHEET" at 503.402,22.555 h1.91
  text "4" at 66.522,6.045 h6.35
  text "4" at 66.522,6.045 h6.35
  text "3" at 203.682,6.045 h6.35
  text "3" at 203.682,6.045 h6.35
  text "2" at 353.542,6.045 h6.35
  text "2" at 353.542,6.045 h6.35

## Other copper
LAYER2:
  pour cut-out: 92.645,102.719 92.606,102.918 92.493,103.086 92.325,103.198 92.127,103.238 91.928,103.198 91.76,103.086 91.648,102.918 91.608,102.719 91.648,102.521 91.76,102.353 91.928,102.24 92.127,102.201 92.325,102.24 92.493,102.353 92.606,102.521 92.645,102.719
  pour cut-out: 0,0 0.254,0 0.254,0.254 0,0.254
  pour cut-out: 0,0 0.254,0 0.254,0.254 0,0.254
  pour cut-out: 0,0 0.254,0 0.254,0.254 0,0.254
  pour cut-out: 0,0 0.254,0 0.254,0.254 0,0.254
  pour cut-out: 0,0 0.254,0 0.254,0.254 0,0.254
  pour cut-out: 0,0 0.254,0 0.254,0.254 0,0.254
  pour cut-out: 0,0 0.254,0 0.254,0.254 0,0.254
  pour cut-out: 0,0 0.254,0 0.254,0.254 0,0.254
  pour cut-out: 0,0 0.254,0 0.254,0.254 0,0.254
  pour cut-out: 0,0 0.254,0 0.254,0.254 0,0.254
  pour cut-out: 0,0 0.254,0 0.254,0.254 0,0.254
  pour cut-out: 0,0 0.254,0 0.254,0.254 0,0.254
  pour cut-out: 0,0 0.254,0 0.254,0.254 0,0.254
  pour cut-out: 0,0 0.254,0 0.254,0.254 0,0.254
  pour cut-out: 0,0 0.254,0 0.254,0.254 0,0.254
  pour cut-out: 0,0 0.254,0 0.254,0.254 0,0.254
  pour cut-out: 0,0 0.254,0 0.254,0.254 0,0.254
  pour cut-out: 0,0 0.254,0 0.254,0.254 0,0.254
  pour cut-out: 0,0 0.254,0 0.254,0.254 0,0.254
  pour cut-out: 0,0 0.254,0 0.254,0.254 0,0.254
  pour cut-out: 0,0 0.254,0 0.254,0.254 0,0.254
  pour cut-out: 0,0 0.254,0 0.254,0.254 0,0.254
  pour cut-out: 0,0 0.254,0 0.254,0.254 0,0.254
  pour cut-out: 0,0 0.254,0 0.254,0.254 0,0.254
  pour cut-out: 0,0 0.254,0 0.254,0.254 0,0.254
  pour cut-out: 0,0 0.254,0 0.254,0.254 0,0.254
  pour cut-out: 0,0 0.254,0 0.254,0.254 0,0.254
  pour cut-out: 0,0 0.254,0 0.254,0.254 0,0.254
  pour cut-out: 0,0 0.254,0 0.254,0.254 0,0.254
  pour cut-out: 0,0 0.254,0 0.254,0.254 0,0.254
  pour cut-out: 0,0 0.254,0 0.254,0.254 0,0.254
  pour cut-out: 0,0 0.254,0 0.254,0.254 0,0.254
  pour cut-out: 0,0 0.254,0 0.254,0.254 0,0.254
  pour cut-out: 0,0 0.254,0 0.254,0.254 0,0.254
  pour cut-out: 0,0 0.254,0 0.254,0.254 0,0.254
  pour cut-out: 0,0 0.254,0 0.254,0.254 0,0.254
  pour cut-out: 0,0 0.254,0 0.254,0.254 0,0.254
  pour cut-out: 0,0 0.254,0 0.254,0.254 0,0.254
  pour cut-out: 0,0 0.254,0 0.254,0.254 0,0.254
  pour cut-out: 0,0 0.254,0 0.254,0.254 0,0.254
  pour cut-out: 0,0 0.254,0 0.254,0.254 0,0.254
  pour cut-out: 0,0 0.254,0 0.254,0.254 0,0.254
  pour cut-out: 0,0 0.254,0 0.254,0.254 0,0.254
  pour cut-out: 0,0 0.254,0 0.254,0.254 0,0.254
  pour cut-out: 0,0 0.254,0 0.254,0.254 0,0.254
  pour cut-out: 0,0 0.254,0 0.254,0.254 0,0.254
  pour cut-out: 85.787,91.718 85.748,91.916 85.635,92.084 85.467,92.197 85.269,92.236 85.07,92.197 84.902,92.084 84.79,91.916 84.75,91.718 84.79,91.519 84.902,91.351 85.07,91.239 85.269,91.199 85.467,91.239 85.635,91.351 85.748,91.519 85.787,91.718
  pour cut-out: 92.758,91.578 92.719,91.776 92.606,91.944 92.438,92.057 92.24,92.096 92.041,92.057 91.873,91.944 91.761,91.776 91.721,91.578 91.761,91.379 91.873,91.211 92.041,91.099 92.24,91.059 92.438,91.099 92.606,91.211 92.719,91.379 92.758,91.578
  pour cut-out: 95.083,95.326 95.043,95.524 94.931,95.693 94.763,95.805 94.564,95.844 94.366,95.805 94.198,95.693 94.085,95.524 94.046,95.326 94.085,95.128 94.198,94.959 94.366,94.847 94.564,94.807 94.763,94.847 94.931,94.959 95.043,95.128 95.083,95.326
  pour cut-out: 94.766,100.66 94.727,100.859 94.614,101.027 94.446,101.139 94.248,101.179 94.049,101.139 93.881,101.027 93.769,100.859 93.729,100.66 93.769,100.462 93.881,100.294 94.049,100.181 94.248,100.142 94.446,100.181 94.614,100.294 94.727,100.462 94.766,100.66
  pour cut-out: 0,0 0.254,0 0.254,0.254 0,0.254
  pour cut-out: 0,0 0.254,0 0.254,0.254 0,0.254
  pour cut-out: 0,0 0.254,0 0.254,0.254 0,0.254
  pour cut-out: 0,0 0.254,0 0.254,0.254 0,0.254
  pour cut-out: 0,0 0.254,0 0.254,0.254 0,0.254
  pour cut-out: 0,0 0.254,0 0.254,0.254 0,0.254
  pour cut-out: 0,0 0.254,0 0.254,0.254 0,0.254
  pour cut-out: 0,0 0.254,0 0.254,0.254 0,0.254
  pour cut-out: 0,0 0.254,0 0.254,0.254 0,0.254
  pour cut-out: 0,0 0.254,0 0.254,0.254 0,0.254
  pour cut-out: 0,0 0.254,0 0.254,0.254 0,0.254
  pour cut-out: 0,0 0.254,0 0.254,0.254 0,0.254
  pour cut-out: 0,0 0.254,0 0.254,0.254 0,0.254
  pour cut-out: 0,0 0.254,0 0.254,0.254 0,0.254
  pour cut-out: 0,0 0.254,0 0.254,0.254 0,0.254
  pour cut-out: 0,0 0.254,0 0.254,0.254 0,0.254
  pour cut-out: 0,0 0.254,0 0.254,0.254 0,0.254
  pour cut-out: 0,0 0.254,0 0.254,0.254 0,0.254
LAYER3:
  pour cut-out: 0,0 0.254,0 0.254,0.254 0,0.254
  pour cut-out: 0,0 0.254,0 0.254,0.254 0,0.254
  pour cut-out: 95.083,95.326 95.043,95.524 94.931,95.693 94.763,95.805 94.564,95.844 94.366,95.805 94.198,95.693 94.085,95.524 94.046,95.326 94.085,95.128 94.198,94.959 94.366,94.847 94.564,94.807 94.763,94.847 94.931,94.959 95.043,95.128 95.083,95.326
BOTTOM:
  pour cut-out: 0,0 0.254,0 0.254,0.254 0,0.254
  pour cut-out: 0,0 0.254,0 0.254,0.254 0,0.254
  pour cut-out: 0,0 0.254,0 0.254,0.254 0,0.254
  pour cut-out: 0,0 0.254,0 0.254,0.254 0,0.254
  pour cut-out: 0,0 0.254,0 0.254,0.254 0,0.254
  pour cut-out: 0,0 0.254,0 0.254,0.254 0,0.254
  pour cut-out: 0,0 0.254,0 0.254,0.254 0,0.254
  pour cut-out: 0,0 0.254,0 0.254,0.254 0,0.254
  pour cut-out: 0,0 0.254,0 0.254,0.254 0,0.254
  pour cut-out: 0,0 0.254,0 0.254,0.254 0,0.254
  pour cut-out: 0,0 0.254,0 0.254,0.254 0,0.254
  pour cut-out: 0,0 0.254,0 0.254,0.254 0,0.254
  pour cut-out: 0,0 0.254,0 0.254,0.254 0,0.254
  pour cut-out: 0,0 0.254,0 0.254,0.254 0,0.254
  pour cut-out: 0,0 0.254,0 0.254,0.254 0,0.254
  pour cut-out: 0,0 0.254,0 0.254,0.254 0,0.254
  pour cut-out: 0,0 0.254,0 0.254,0.254 0,0.254
  pour cut-out: 0,0 0.254,0 0.254,0.254 0,0.254
  pour cut-out: 0,0 0.254,0 0.254,0.254 0,0.254
  pour cut-out: 0,0 0.254,0 0.254,0.254 0,0.254
  pour cut-out: 0,0 0.254,0 0.254,0.254 0,0.254
  pour cut-out: 0,0 0.254,0 0.254,0.254 0,0.254
  pour cut-out: 0,0 0.254,0 0.254,0.254 0,0.254
  pour cut-out: 0,0 0.254,0 0.254,0.254 0,0.254
  pour cut-out: 0,0 0.254,0 0.254,0.254 0,0.254
  pour cut-out: 0,0 0.254,0 0.254,0.254 0,0.254
  pour cut-out: 0,0 0.254,0 0.254,0.254 0,0.254
  pour cut-out: 0,0 0.254,0 0.254,0.254 0,0.254
  pour cut-out: 0,0 0.254,0 0.254,0.254 0,0.254
  pour cut-out: 0,0 0.254,0 0.254,0.254 0,0.254
  pour cut-out: 0,0 0.254,0 0.254,0.254 0,0.254
  pour cut-out: 0,0 0.254,0 0.254,0.254 0,0.254
  pour cut-out: 0,0 0.254,0 0.254,0.254 0,0.254
  pour cut-out: 0,0 0.254,0 0.254,0.254 0,0.254
  pour cut-out: 0,0 0.254,0 0.254,0.254 0,0.254
  pour cut-out: 0,0 0.254,0 0.254,0.254 0,0.254
  pour cut-out: 0,0 0.254,0 0.254,0.254 0,0.254
  pour cut-out: 0,0 0.254,0 0.254,0.254 0,0.254
  pour cut-out: 0,0 0.254,0 0.254,0.254 0,0.254
  pour cut-out: 0,0 0.254,0 0.254,0.254 0,0.254
  pour cut-out: 0,0 0.254,0 0.254,0.254 0,0.254
  pour cut-out: 0,0 0.254,0 0.254,0.254 0,0.254
  pour cut-out: 0,0 0.254,0 0.254,0.254 0,0.254
  pour cut-out: 0,0 0.254,0 0.254,0.254 0,0.254
  pour cut-out: 0,0 0.254,0 0.254,0.254 0,0.254
  pour cut-out: 0,0 0.254,0 0.254,0.254 0,0.254
  pour cut-out: 0,0 0.254,0 0.254,0.254 0,0.254
  pour cut-out: 0,0 0.254,0 0.254,0.254 0,0.254
  pour cut-out: 0,0 0.254,0 0.254,0.254 0,0.254
  pour cut-out: 0,0 0.254,0 0.254,0.254 0,0.254
  pour cut-out: 0,0 0.254,0 0.254,0.254 0,0.254
  pour cut-out: 0,0 0.254,0 0.254,0.254 0,0.254
  pour cut-out: 0,0 0.254,0 0.254,0.254 0,0.254
  pour cut-out: 0,0 0.254,0 0.254,0.254 0,0.254
  pour cut-out: 0,0 0.254,0 0.254,0.254 0,0.254
  pour cut-out: 0,0 0.254,0 0.254,0.254 0,0.254
  pour cut-out: 0,0 0.254,0 0.254,0.254 0,0.254
  pour cut-out: 0,0 0.254,0 0.254,0.254 0,0.254
  pour cut-out: 0,0 0.254,0 0.254,0.254 0,0.254
  pour cut-out: 0,0 0.254,0 0.254,0.254 0,0.254
  pour cut-out: 0,0 0.254,0 0.254,0.254 0,0.254
  pour cut-out: 0,0 0.254,0 0.254,0.254 0,0.254
  pour cut-out: 0,0 0.254,0 0.254,0.254 0,0.254
  pour cut-out: 0,0 0.254,0 0.254,0.254 0,0.254
  pour cut-out: 0,0 0.254,0 0.254,0.254 0,0.254
  pour cut-out: 0,0 0.254,0 0.254,0.254 0,0.254
  pour cut-out: 0,0 0.254,0 0.254,0.254 0,0.254
  pour cut-out: 0,0 0.254,0 0.254,0.254 0,0.254
  pour cut-out: 0,0 0.254,0 0.254,0.254 0,0.254
  pour cut-out: 0,0 0.254,0 0.254,0.254 0,0.254
  pour cut-out: 0,0 0.254,0 0.254,0.254 0,0.254
  pour cut-out: 0,0 0.254,0 0.254,0.254 0,0.254
  pour cut-out: 0,0 0.254,0 0.254,0.254 0,0.254
  pour cut-out: 0,0 0.254,0 0.254,0.254 0,0.254
  pour cut-out: 0,0 0.254,0 0.254,0.254 0,0.254
  pour cut-out: 0,0 0.254,0 0.254,0.254 0,0.254
  pour cut-out: 0,0 0.254,0 0.254,0.254 0,0.254
  pour cut-out: 0,0 0.254,0 0.254,0.254 0,0.254
  pour cut-out: 0,0 0.254,0 0.254,0.254 0,0.254
  pour cut-out: 0,0 0.254,0 0.254,0.254 0,0.254
  pour cut-out: 0,0 0.254,0 0.254,0.254 0,0.254
  pour cut-out: 0,0 0.254,0 0.254,0.254 0,0.254

## Silkscreen, mask and mechanical layers (free items; w line width, h text height)
Bottom Overlay:
  text "101-00001-02" at 97.483,91.486 h1.27
NCLEGEND-1-4:
  circle w0.025: c34.093,172.532 r0.508
  circle w0.025: c34.093,178.882 r0.305
  circle w0.025: c34.093,185.232 r0.254
  lines w0.025: 22.676,175.707 193.541,175.707 ; 22.676,182.057 193.541,182.057 ; 22.676,188.407 193.541,188.407 ; 22.676,194.757 193.541,194.757 ; 22.676,201.107 193.541,201.107 ; 45.51,169.357 45.51,194.757 ; 93.542,169.357 93.542,194.757 ; 141.573,169.357 141.573,194.757 ; 173.856,169.357 173.856,194.757 ; 22.676,169.357 193.541,169.357 193.541,207.457 22.676,207.457 22.676,169.357
  text "DRILL CHART: TOP to BOTTOM" at 75.088,202.695 h3.17
  text "ALL UNITS ARE IN MILS" at 81.438,196.345 h3.17
  text "FIGURE" at 26.473,189.995 h3.17
  text "SIZE" at 64.446,189.995 h3.17
  text "TOLERANCE" at 106.127,189.995 h3.17
  text "PLATED" at 150.095,189.995 h3.17
  text "QTY" at 179.889,189.995 h3.17
  text "8.0" at 65.716,183.645 h3.17
  text "+3.0/-8.0" at 106.127,183.645 h3.17
  text "PLATED" at 150.095,183.645 h3.17
  text "151" at 179.889,183.645 h3.17
  text "12.0" at 64.446,177.295 h3.17
  text "+3.0/-12.0" at 104.857,177.295 h3.17
  text "PLATED" at 150.095,177.295 h3.17
  text "9" at 182.429,177.295 h3.17
  text "20.0" at 64.446,170.945 h3.17
  text "+3.0/-3.0" at 106.127,170.945 h3.17
  text "PLATED" at 150.095,170.945 h3.17
  text "29" at 181.159,170.945 h3.17
XSECTION_CHART:
  region: 128.794,37.284 166.894,37.284 166.894,42.334 128.794,42.334
  region: 128.794,49.547 166.894,49.547 166.894,54.597 128.794,54.597
  region: 128.794,70.62 166.894,70.62 166.894,75.669 128.794,75.669
  region: 128.794,82.883 166.894,82.883 166.894,87.933 128.794,87.933
  lines w0.025: 128.794,37.284 128.794,87.933 ; 166.894,37.284 166.894,87.933 ; 128.794,42.334 166.894,42.334 166.894,49.547 128.794,49.547 128.794,42.334 ; 128.794,54.597 166.894,54.597 166.894,70.62 128.794,70.62 128.794,54.597 ; 128.794,75.669 166.894,75.669 166.894,82.883 128.794,82.883 128.794,75.669
  text "*  SURFACE - AIR 0 MIL" at 166.894,88.466 h1.6
  text "L1: TOP CONDUCTOR - COPPER 1.4 MIL" at 166.894,85.408 h1.6
  text "*  DIELECTRIC - FR-4 8 MIL" at 166.894,79.276 h1.6
  text "L2: LAYER2 PLANE - COPPER 1.4 MIL" at 166.894,73.145 h1.6
  text "*  DIELECTRIC - FR-4 17.77 MIL" at 166.894,62.608 h1.6
  text "L3: LAYER3 CONDUCTOR - COPPER 1.4 MIL" at 166.894,52.072 h1.6
  text "*  DIELECTRIC - FR-4 8 MIL" at 166.894,45.94 h1.6
  text "L4: BOTTOM CONDUCTOR - COPPER 1.4 MIL" at 166.894,39.809 h1.6
  text "*  SURFACE - AIR 0 MIL" at 166.894,35.151 h1.6
  text "___________________________" at 130.562,31.417 h1.6
  text "DESIGN CROSS SECTION CHART" at 131.202,31.417 h1.6
  text "TOTAL THICKNESS 39.37 MIL" at 131.842,28.216 h1.6
ASSEMBLY_NOTES:
  text "FABRICATION NOTES" at 332.471,375.083 h2.54
  text "1. BASE MATERIAL" at 332.158,369.62 h2.54
  text "1. BASE MATERIAL" at 332.158,369.62 h2.54
  text "A.  1 MM +/- 10% THICK GLASS EPOXY, FR-4, TG 170" at 332.158,364.54 h2.54
  text "A.  1 MM +/- 10% THICK GLASS EPOXY, FR-4, TG 170" at 332.158,364.54 h2.54
  text "NATURAL COLOR NEMA GRADE" at 332.158,359.46 h2.54
  text "NATURAL COLOR NEMA GRADE" at 332.158,359.46 h2.54
  text "B. COPPER WEIGHT AS PER PROVIDED STACK-UP" at 332.158,354.38 h2.54
  text "B. COPPER WEIGHT AS PER PROVIDED STACK-UP" at 332.158,354.38 h2.54
  text "2. FINISH:  ENIG.  NO EXPOSED COPPER PERMITTED" at 332.095,349.3 h2.54
  text "2. FINISH:  ENIG.  NO EXPOSED COPPER PERMITTED" at 332.095,349.3 h2.54
  text "3. ALL TRACE WIDTHS ARE STATED AS FINISHED TRACE WIDTHS" at 332.158,344.22 h2.54
  text "3. ALL TRACE WIDTHS ARE STATED AS FINISHED TRACE WIDTHS" at 332.158,344.22 h2.54
  text "4. DRILL SIZES ARE STATED AS TOOL SIZES" at 331.929,339.472 h2.54
  text "4. DRILL SIZES ARE STATED AS TOOL SIZES" at 331.929,339.472 h2.54
  text "5. ALL DIMENSIONS ARE IN INCHES UNLESS OTHERWISE STATED" at 332.161,333.737 h2.54
  text "6. SOLDERMASK" at 332.161,327.387 h2.54
  text "A.  PHOTO-IMAGED LIQUID POLYMER IN ACCORDANCE WITH" at 332.161,324.212 h2.54
  text "IPC-SM840D, TYPE B1, CLASS T, OVER BARE COPPER AS" at 332.161,321.037 h2.54
  text "INDICATED WITHIN THE ELECTRONIC DATA" at 332.161,317.862 h2.54
  text "B.  SOLDERMASK COLOR IS TO BE GREEN" at 332.161,314.687 h2.54
  text "C. FINISH IS TO BE MATTE" at 331.995,310.034 h2.54
  text "7. SILKSCREEN" at 332.332,304.54 h2.54
  text "A.  SILKSCREEN AS INDICATED WITHIN THE ELECTRONIC DATA" at 332.332,301.365 h2.54
  text "USING NON CONDUCTIVE WHITE EPOXY INK" at 332.332,298.19 h2.54
  text "B.  SILKSCREEN TO BE REMOVED FROM VIAS, PADS, AND HOLES" at 332.332,295.015 h2.54
  text "PROVIDING A MINIMUM CLEARANCE OF 0.005 INCHES" at 332.332,291.84 h2.54
  text "C.  VENDOR'S UL LOGO OR DESIGNATION SHALL BE RUBBER" at 332.332,288.665 h2.54
  text "STAMPED OR SILKSCREENED AT THE VENDOR'S DISCRETION" at 332.332,285.49 h2.54
  text "ON EITHER SIDE OF THE PCB" at 332.332,282.315 h2.54
  text "8. OTHER APPLICABLE STANDARDS" at 332.332,279.14 h2.54
  text "A.  FABRICATE PER IPC-2221A CLASS 2 LEVEL B," at 332.332,275.965 h2.54
  text "IPC-2222 TYPE 3.  INSPECT PER IPC-A-600G CLASS 2" at 332.332,272.79 h2.54
  text "B.  FABRICATE IN ACCORDANCE WITH IPC-6012B CLASS 2," at 332.332,269.615 h2.54
  text "PER IPC-6011 USING SUPPLIED DATA FILES" at 332.332,266.44 h2.54
  text "C.  THIS BOARD SHALL CONFORM TO UL94V-0" at 332.332,263.265 h2.54
  text "9. OTHER APPLICABLE NOTES" at 332.332,256.915 h2.54
  text "A.  REFER TO STACK-UP AND IMPEDANCE INFORMATION" at 332.332,253.74 h2.54
  text "B.  TEARDROPPING IS ACCEPTABLE ON INNER SIGNAL LAYERS" at 332.332,250.565 h2.54
  text "C.  COPPER THIEVING MAY NOT BE ADDED TO PCB DESIGN, ONLY TO PANEL" at 332.332,247.39 h2.54
  text "D.  BOW OR TWIST NOT TO EXCEED 0.178 MM/25.4 MM" at 332.332,244.215 h2.54
  text "E.  THE PCB SHALL BE 100% ELECTRICALLY TESTED FOR OPENS" at 332.332,241.04 h2.54
  text "AND SHORTS.  THE RESULTS OF THIS TEST SHALL BE" at 332.332,237.865 h2.54
  text "DOCUMENTED AND DELIVERED WITH EACH LOT" at 332.332,234.69 h2.54
  text "10.ROHS COMPLIANCE IS REQUIRED" at 332.332,231.515 h2.54
  text "A.  ALL MATERIALS USED WITHIN THE FABRICATION ARE TO BE" at 332.332,228.34 h2.54
  text "ROHS COMPLIANT AND MUST SUPPORT A PB-FREE ASSEMBLY" at 332.332,225.165 h2.54
  text "PROCESS (E.G. ACCEPTABLE TG/TD, ETC)" at 332.332,221.99 h2.54
  text "11.PANEL DESIGN:  PCBS SHALL BE ROUTED WITH MOUSE BITES. NO V-SCORE ON ANY SIDE." at 332.332,218.815 h2.54
  text "INCLUDE TOOLING HOLES AND FIDUCIALS.  BOARDS TO REMAIN" at 332.332,215.64 h2.54
  text "ON THE PANEL FOR ASSEMBLY." at 332.332,212.465 h2.54
  text "12.TARGET IMPEDANCE LAYER 1: 0.01409 INCH TRACK WIDTH = 50 OHM +/- 10%" at 332.293,207.451 h2.54
  text "13.ANY ARTWORK MODIFICATIONS MUST BE REVIEWED AND APPROVED BY" at 332.089,202.566 h2.54
  text "MMB NETWORKS PRIOR TO MANUFACTURING" at 332.21,198.422 h2.54
DRAWING_ORIGIN:
  lines w0.025: 71.983,89.711 73.253,89.711 ; 72.618,89.076 72.618,90.346

## Text inside footprints (layer, text, board x,y; h text height)
ANT1: PIN_NUMBER "1" at 74.357,95.625 h0.64 r270
C1: PIN_NUMBER "2" at 85.503,97.2 h0.64; PIN_NUMBER "1" at 84.487,97.2 h0.64
C2: PIN_NUMBER "2" at 78.614,99.108 h0.64 r270; PIN_NUMBER "1" at 78.614,100.008 h0.64 r270
C3: PIN_NUMBER "2" at 77.713,99.107 h0.64 r180; PIN_NUMBER "1" at 78.613,99.107 h0.64 r180
C4: PIN_NUMBER "1" at 75.483,99.098 h0.64 r180; PIN_NUMBER "2" at 74.467,99.098 h0.64 r180
C5: PIN_NUMBER "2" at 85.561,94.757 h0.64; PIN_NUMBER "1" at 84.545,94.757 h0.64
C6: PIN_NUMBER "1" at 85.392,99.158 h0.64 r270; PIN_NUMBER "2" at 85.392,98.142 h0.64 r270
C7: PIN_NUMBER "1" at 82.617,99.133 h0.64 r270; PIN_NUMBER "2" at 82.617,98.117 h0.64 r270
C9: PIN_NUMBER "1" at 96.094,96.995 h0.64 r180; PIN_NUMBER "2" at 95.078,96.995 h0.64 r180
C10: PIN_NUMBER "1" at 96.105,96.002 h0.64 r180; PIN_NUMBER "2" at 95.089,96.002 h0.64 r180
C11: PIN_NUMBER "1" at 96.142,98.595 h0.64 r180; PIN_NUMBER "2" at 95.126,98.595 h0.64 r180
C12: PIN_NUMBER "1" at 96.136,100.576 h0.64 r180; PIN_NUMBER "2" at 95.12,100.576 h0.64 r180
C13: PIN_NUMBER "1" at 96.141,99.588 h0.64 r180; PIN_NUMBER "2" at 95.125,99.588 h0.64 r180
C14: PIN_NUMBER "2" at 93.207,100.525 h0.64 r270; PIN_NUMBER "1" at 93.207,101.541 h0.64 r270
C16: PIN_NUMBER "2" at 92.193,100.531 h0.64 r270; PIN_NUMBER "1" at 92.193,101.547 h0.64 r270
C17: PIN_NUMBER "2" at 86.023,96.215 h0.64; PIN_NUMBER "1" at 85.007,96.215 h0.64
C18: PIN_NUMBER "1" at 90.399,91.796 h0.64 r180; PIN_NUMBER "2" at 89.383,91.796 h0.64 r180
J1: PIN_NUMBER "1" at 77.103,101.789 h0.64 r270; PIN_NUMBER "3" at 75.603,100.314 h0.64 r270; PIN_NUMBER "2" at 75.603,103.264 h0.64 r270; PIN_NUMBER "4" at 74.103,101.789 h0.64 r270
J2: PIN_NUMBER "7" at 91.821,90.211 h0.64; PIN_NUMBER "8" at 93.091,90.211 h0.64; PIN_NUMBER "9" at 94.361,90.211 h0.64; PIN_NUMBER "11" at 96.647,90.211 h0.64; PIN_NUMBER "1" at 84.201,90.211 h0.64; PIN_NUMBER "6" at 90.551,90.211 h0.64; PIN_NUMBER "5" at 89.281,90.211 h0.64; PIN_NUMBER "10" at 95.377,90.211 h0.64; PIN_NUMBER "2" at 85.471,90.211 h0.64; PIN_NUMBER "4" at 88.011,90.211 h0.64; PIN_NUMBER "3" at 86.741,90.211 h0.64
J3: PIN_NUMBER "21" at 94.107,104.219 h0.64 r180; PIN_NUMBER "24" at 90.297,104.219 h0.64 r180; PIN_NUMBER "19" at 96.647,104.219 h0.64 r180; PIN_NUMBER "29" at 83.947,104.219 h0.64 r180; PIN_NUMBER "28" at 85.217,104.219 h0.64 r180; PIN_NUMBER "25" at 89.027,104.219 h0.64 r180; PIN_NUMBER "20" at 95.377,104.219 h0.64 r180; PIN_NUMBER "26" at 87.757,104.219 h0.64 r180; PIN_NUMBER "27" at 86.487,104.219 h0.64 r180; PIN_NUMBER "22" at 92.837,104.219 h0.64 r180; PIN_NUMBER "23" at 91.567,104.219 h0.64 r180
J4: PIN_NUMBER "17" at 98.252,99.751 h0.64 r90; PIN_NUMBER "12" at 98.252,93.401 h0.64 r90; PIN_NUMBER "13" at 98.252,94.671 h0.64 r90; PIN_NUMBER "14" at 98.252,95.941 h0.64 r90; PIN_NUMBER "15" at 98.252,97.211 h0.64 r90; PIN_NUMBER "16" at 98.252,98.481 h0.64 r90; PIN_NUMBER "18" at 98.252,101.021 h0.64 r90
L1: PIN_NUMBER "2" at 86.367,98.558 h0.64 r90; PIN_NUMBER "1" at 86.367,97.542 h0.64 r90
L2: PIN_NUMBER "2" at 83.509,99.125 h0.64 r180; PIN_NUMBER "1" at 84.525,99.125 h0.64 r180
L4: PIN_NUMBER "1" at 76.469,99.119 h0.64 r270; PIN_NUMBER "2" at 76.469,98.103 h0.64 r270
L5: PIN_NUMBER "1" at 73.498,99.129 h0.64 r270; PIN_NUMBER "2" at 73.498,98.113 h0.64 r270
L6: PIN_NUMBER "2" at 94.056,99.619 h0.64 r90; PIN_NUMBER "1" at 94.056,98.603 h0.64 r90
S1: PIN_NUMBER "1" at 96.023,90.823 h0.64
TP1: PIN_NUMBER "1" at 94.164,97.638 h0.64
U1: PIN_NUMBER "2" at 88.423,92.014 h0.6 r90; PIN_NUMBER "3" at 88.923,92.014 h0.6 r90; PIN_NUMBER "7" at 90.923,92.014 h0.6 r90; PIN_NUMBER "8" at 91.423,92.014 h0.6 r90; PIN_NUMBER "10" at 91.943,92.014 h0.6 r90; PIN_NUMBER "11" at 93.818,93.886 h0.6 r180; PIN_NUMBER "12" at 93.818,94.386 h0.6 r180; PIN_NUMBER "13" at 93.818,94.886 h0.6 r180; PIN_NUMBER "14" at 93.818,95.386 h0.6 r180; PIN_NUMBER "37" at 86.528,95.389 h0.6 r180; PIN_NUMBER "36" at 86.528,95.889 h0.6 r180; PIN_NUMBER "34" at 86.528,96.889 h0.6 r180; PIN_NUMBER "22" at 92.398,100.264 h0.6 r90; PIN_NUMBER "35" at 86.528,96.389 h0.6 r180; PIN_NUMBER "32" at 86.528,97.889 h0.6 r180; PIN_NUMBER "31" at 86.528,98.389 h0.6 r180; PIN_NUMBER "33" at 86.528,97.389 h0.6 r180; PIN_NUMBER "41" at 90.653,97.439 h0.6 r90; PIN_NUMBER "30" at 88.398,100.264 h0.6 r90; PIN_NUMBER "29" at 88.898,100.264 h0.6 r90; PIN_NUMBER "27" at 89.898,100.264 h0.6 r90; PIN_NUMBER "28" at 89.398,100.264 h0.6 r90; PIN_NUMBER "26" at 90.398,100.264 h0.6 r90; PIN_NUMBER "25" at 90.898,100.264 h0.6 r90; PIN_NUMBER "24" at 91.398,100.264 h0.6 r90; PIN_NUMBER "23" at 91.898,100.264 h0.6 r90; PIN_NUMBER "21" at 92.898,100.264 h0.6 r90; PIN_NUMBER "20" at 93.818,98.386 h0.6 r180; PIN_NUMBER "19" at 93.818,97.886 h0.6 r180; PIN_NUMBER "18" at 93.818,97.386 h0.6 r180; PIN_NUMBER "17" at 93.818,96.886 h0.6 r180; PIN_NUMBER "16" at 93.818,96.386 h0.6 r180; PIN_NUMBER "5" at 89.923,92.014 h0.6 r90; PIN_NUMBER "9" at 91.923,92.014 h0.6 r90; PIN_NUMBER "40" at 86.528,93.889 h0.6 r180; PIN_NUMBER "4" at 89.423,92.014 h0.6 r90; PIN_NUMBER "6" at 90.423,92.014 h0.6 r90; PIN_NUMBER "15" at 93.818,95.886 h0.6 r180; PIN_NUMBER "38" at 86.528,94.889 h0.6 r180; PIN_NUMBER "39" at 86.528,94.389 h0.6 r180; PIN_NUMBER "1" at 87.923,92.014 h0.6 r90
X1: PIN_NUMBER "1" at 87.271,102.176 h0.64 r180; PIN_NUMBER "2" at 85.77,102.176 h0.64 r180
X2: PIN_NUMBER "2" at 88.608,102.491 h0.64 r180; PIN_NUMBER "3" at 88.608,101.191 h0.64 r180; PIN_NUMBER "1" at 90.307,102.491 h0.64 r180; PIN_NUMBER "4" at 90.307,101.191 h0.64 r180; ASSEMBLY_TOP "1" at 90.782,102.541 h0.64 r180